# Altium PCB Micros.PcbDoc
Units mm, origin at the board's own origin, x right, y up, seen from the top; angles counter-clockwise.
Board outline 152.4 x 101.6 mm, 2 copper layers (Top Layer, Bottom Layer); 17 components, 26 nets, 97 pads, 0 vias.
Unrouted connection lines stored in the file: 39.
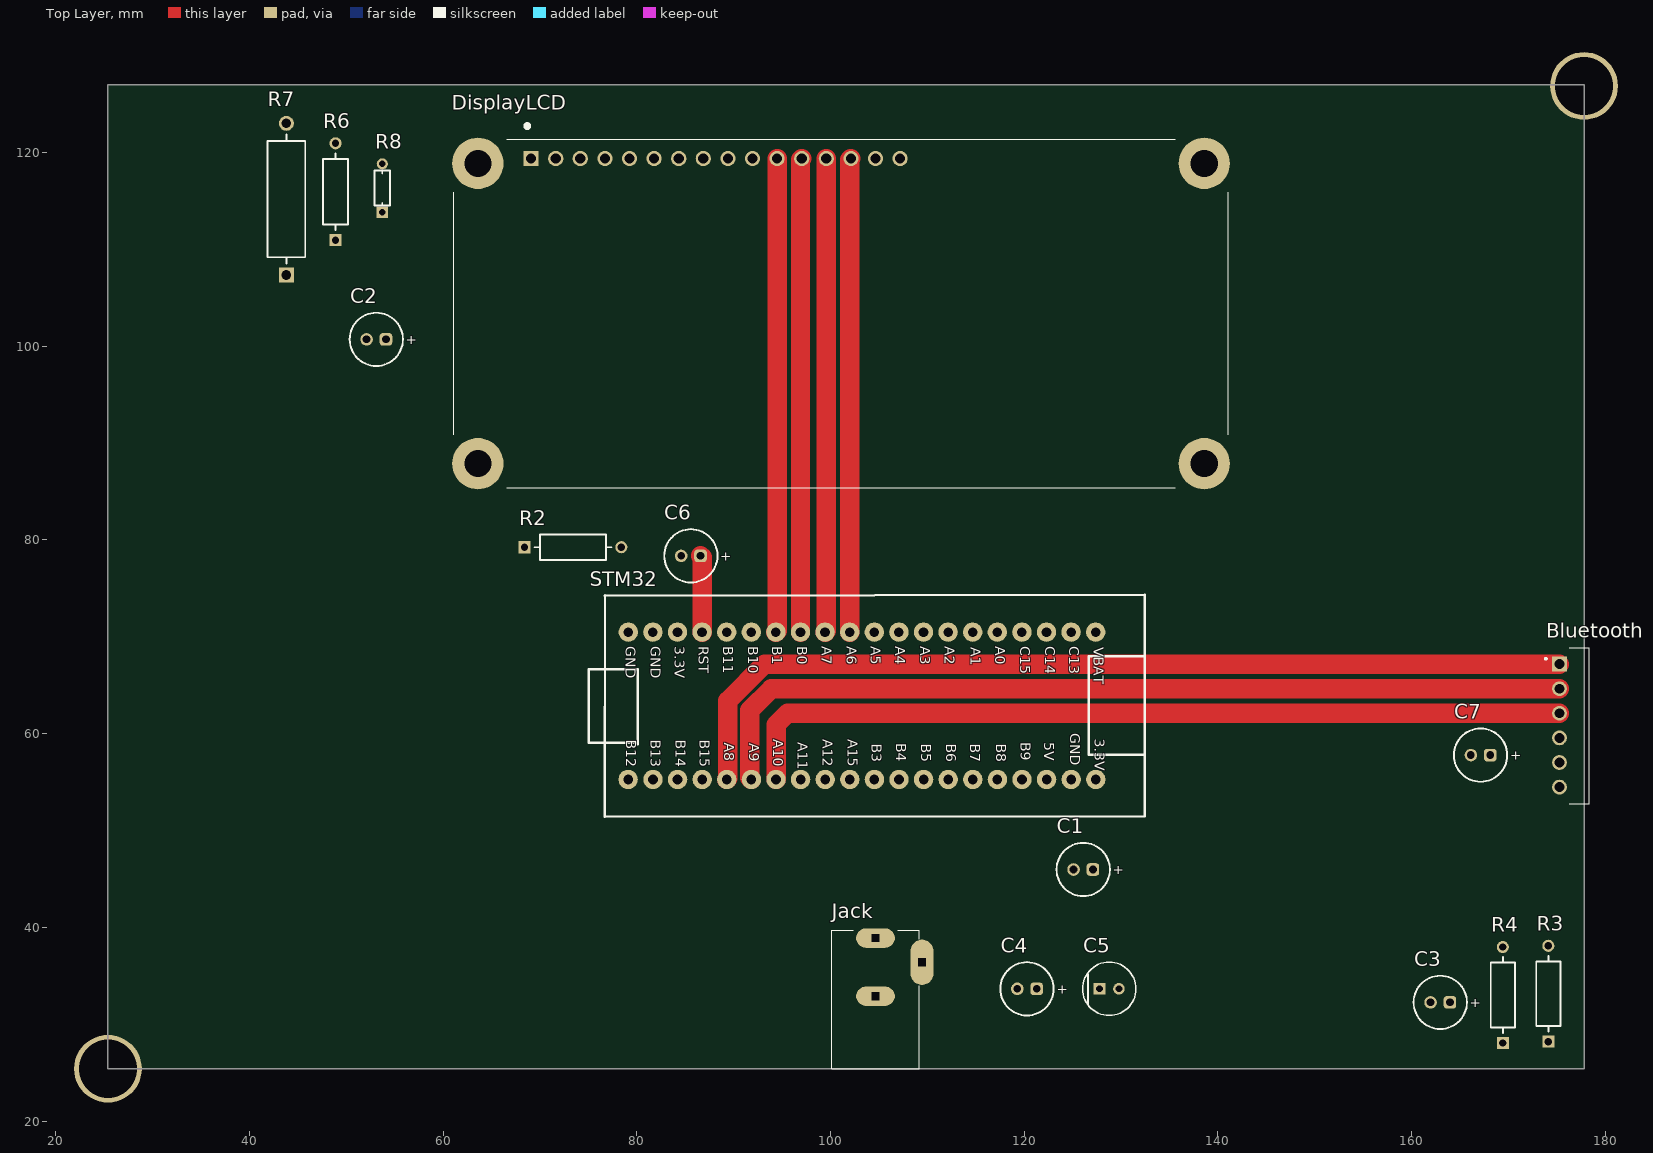
[diagram p0: Top Layer view]
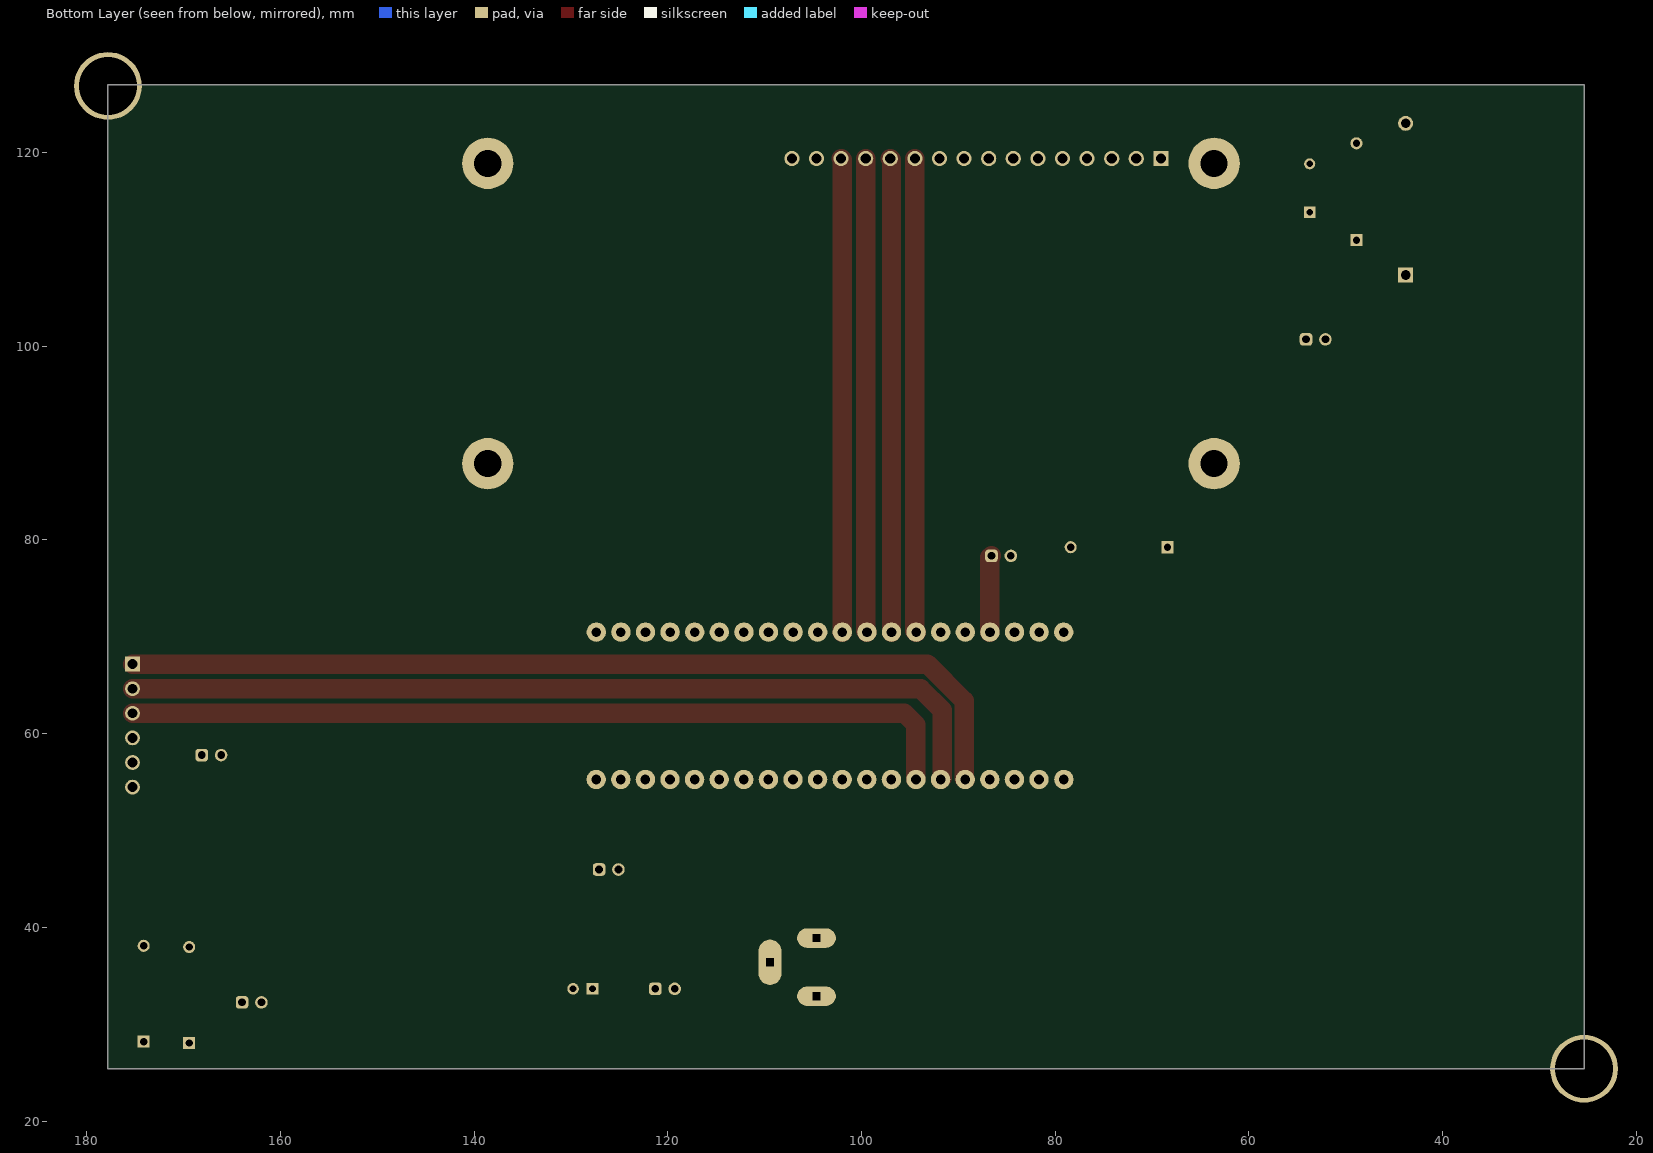
[diagram p1: Bottom Layer view, seen from below]

## Layer stack, top to bottom
Top Solder: solder mask 0.0102, Solder Resist, Dk 3.5
Top Layer: signal copper 0.0356
Dielectric 1: dielectric 0.32, FR-4, Dk 4.8
Bottom Layer: signal copper 0.0356
Bottom Solder: solder mask 0.0102, Solder Resist, Dk 3.5

## Board outline
25.4,25.4 177.8,25.4 177.8,127 25.4,127

## Design rules (kind name [scope] priority, off if disabled: settings)
Clearance [All] p1: gap=0.254 ignorepadtopadclearanceinfootprint=FALSE
PolygonConnect [All] p1: connectstyle=Relief reliefconductorwidth=0.254 reliefentries=4 polygonreliefangle="90 Angle" airgapwidth=0.254
RoutingVias [All] p1: holewidth=0.711 width=1.27 viastyle="Through Hole" minholewidth=0.711 minwidth=1.27 maxholewidth=0.711 maxwidth=1.27
SolderMaskExpansion [All] p1: expansion=0.102 istentingtop=FALSE
SupplyNets "Schematic Supply Nets_1" [InNet('GND')] p1: voltage=0.000
SupplyNets "Schematic Supply Nets" [InNet('5V')] p2: voltage=0.000
Width [All] p1: maxlimit=2 minlimit=2 preferedwidth=2 minimp=50.000000 maximp=50.000000 favimp=50.000000
30 further rules are at their usual default settings.

## Classes and differential pairs
component class Micros: Bluetooth C1 C2 C3 C4 C5 C7 DisplayLCD Jack R2 R3 R4 R6 R7 R8 STM32

## Components (designator, comment, footprint, x,y, rotation, side; value= is the part's Value field where it differs from the comment)
Bluetooth "ZC142200" MODULE_ZC142200 175.26,60.833 r0 top
C1 "100nF" WCAP-ATG8_D5H11 1396.095,1315.974 r0 top
C2 "100nF" WCAP-ATG8_D5H11 1323.102,1370.711 r0 top
C3 "100nF" WCAP-ATG8_D5H11 1432.957,1302.258 r0 top
C4 "100nF" WCAP-ATG8_D5H11 1390.285,1303.655 r0 top
C5 "10uF" FP-RAD-TH-D_5_0_5-L_11_1-MFG 128.778,33.655 r0 top
C6 "100nF" WCAP-ATG8_D5H11 1355.582,1348.359 r0 top
C7 "100nF" WCAP-ATG8_D5H11 1437.116,1327.785 r0 top
DisplayLCD "NHD-14432WG-BTFH-V#T" LCD_NHD-14432WG-BTFH-V#T 101.638,103.08 r0 top
Jack "DC-005" NINIGI_DC-005 104.648,36.393 r90 top
R2 "10K" FP-MF0207-MFG 73.406,79.248 r0 top
R3 "4.7k" FP-RCMM02-MFG 174.117,33.147 r90 top
R4 "4.7k" FP-RCMM02-MFG 169.418,33.02 r90 top
R6 "10K" FP-MF0207-MFG 48.895,115.951 r90 top
R7 "100K" FP-PR02000201003JA100-MFG 43.815,115.189 r90 top
R8 "220" FP-MBA0204-MFG 53.721,116.332 r90 top value=220Ω
STM32 "BluePill" "Stm32 BluePill" 109.015,63.099 r270 top

## Footprints (in the part's own frame and the unit in brackets; to place one, negate y for a bottom-side part, rotate by r counter-clockwise, add the part's x,y. Pads: shape width x height; smd on the part's side, far side on the other; paste and mask are expansions set on the pad)
FP-MBA0204-MFG [mm]
  rect 1.15x1.15 hole 0.65 paste-2539.97 mask+0: 1(-2.5,0)
  round 1.15 hole 0.65 paste-2539.97 mask+0: 2(2.5,0)
  silkscreen extent -1.8,-0.8 1.8,0.8, body extent -3.17,-0.9 3.17,0.9, height 0.25
FP-MF0207-MFG [mm]
  rect 1.25x1.25 hole 0.75 paste-2539.97 mask+0: 1(-5,0)
  round 1.25 hole 0.75 paste-2539.97 mask+0: 2(5,0)
  silkscreen extent -3.98,-1.3 3.98,1.3, body extent -5.72,-1.4 5.72,1.4, height 0.25
FP-PR02000201003JA100-MFG [mm]
  rect 1.55x1.55 hole 1 paste-2539.97 mask+0: 1(-7.83,0)
  round 1.55 hole 1 paste-2539.97 mask+0: 2(7.83,0)
  silkscreen extent -6.66,-1.95 6.66,1.95, body extent -8.7,-2.05 8.7,2.05, height 0.25
FP-RAD-TH-D_5_0_5-L_11_1-MFG [mm]
  rect 1.2x1.2 hole 0.7 paste-2539.97 mask+0: 1(-1,0)
  round 1.2 hole 0.7 paste-2539.97 mask+0: 2(1,0)
  silkscreen extent -2.75,-2.75 2.75,2.75, body extent -2.85,-2.85 2.85,2.85, height 0.25
FP-RCMM02-MFG [mm]
  rect 1.25x1.25 hole 0.75 paste-2539.97 mask+0: 1(-4.95,0)
  round 1.25 hole 0.75 paste-2539.97 mask+0: 2(4.95,0)
  silkscreen extent -3.93,-1.25 3.93,1.25, body extent -5.68,-1.35 5.68,1.35, height 0.25
LCD_NHD-14432WG-BTFH-V#T [mm]
  rect 1.575x1.575 / inner round 1.575 / far side rect 1.575x1.575 hole 1.05: 1(-32.55,16.3)
  round 1.575 hole 1.05: 2(-30.01,16.3) 3(-27.47,16.3) 4(-24.93,16.3) 5(-22.39,16.3) 6(-19.85,16.3) 7(-17.31,16.3) 8(-14.77,16.3) 9(-12.23,16.3) 10(-9.69,16.3) 11(-7.15,16.3) 12(-4.61,16.3) 13(-2.07,16.3) 14(0.47,16.3) 15(3.01,16.3) 16(5.55,16.3)
  round 5.3 hole 2.8: S1(-38.05,15.8) S2(-38.05,-15.2) S3(36.95,15.8) S4(36.95,-15.2)
  silkscreen extent -40.55,-17.7 39.45,19.85, body extent -40,-18 40,18, height 10.2
MODULE_ZC142200 [mm]
  rect 1.53x1.53 / inner round 1.53 / far side rect 1.53x1.53 hole 1.02: 1(0,6.35)
  round 1.53 hole 1.02: 2(0,3.81) 3(0,1.27) 4(0,-1.27) 5(0,-3.81) 6(0,-6.35)
  silkscreen extent -1.5,-8.05 3.1,8.05, body extent -0.31,-7.5 3.1,7.5, height 37
NINIGI_DC-005 [mm]
  oval 4.7x2.35 hole 0.8 square: 2(0,-4.8)
  oval 2x4 hole 0.8 square: 3(-3.5,0) 4(2.5,0)
  silkscreen extent -11,-4.5 3.3,4.5
"Stm32 BluePill" [mm]
  round 2 hole 1: 1(7.828,-29.909) 2(7.828,-27.343) 3(7.828,-24.803) 4(7.828,-22.263) 5(7.828,-19.723) 6(7.828,-17.183) 7(7.828,-14.643) 8(7.828,-12.103) 9(7.828,-9.563) 10(7.828,-7.023) 11(7.828,-4.483) 12(7.828,-1.943) 13(7.828,0.597) 14(7.828,3.137) 15(7.828,5.677) 16(7.828,8.217) 17(7.828,10.757) 18(7.828,13.297) 19(7.828,15.837) 20(7.828,18.377) 21(-7.386,18.366) 22(-7.386,15.826) 23(-7.386,13.286) 24(-7.386,10.746) 25(-7.386,8.206) 26(-7.386,5.666) 27(-7.386,3.126) 28(-7.386,0.586) 29(-7.386,-1.954) 30(-7.386,-4.494) 31(-7.386,-7.034) 32(-7.386,-9.574) 33(-7.386,-12.114) 34(-7.386,-14.654) 35(-7.386,-17.194) 36(-7.386,-19.734) 37(-7.386,-22.274) 38(-7.386,-24.814) 39(-7.386,-27.354) 40(-7.386,-29.894)
  silkscreen extent -11.22,-34 11.69,23.43, body extent -11.18,-33.27 11.68,24.29, height 12.31
WCAP-ATG8_D5H11 [mm] "Aluminum Electrolytic Capacitors, 5x11mm"
  rrect50% 1.3x1.3 hole 0.8: 1(-1269,-1270)
  round 1.3 hole 0.8: 2(-1271,-1270)
  silkscreen extent -1272.75,-1272.75 -1267.25,-1267.25, body extent -1272.49,-1272.5 -1267.5,-1267.5, height 11.31

## Part data
Bluetooth: library part CMP-013-000000-1, "1pc HC-05 6 Pin Wireless Bluetooth RF Transceiver Module Serial For Arduino", Package=None, Check_prices=https://www.snapeda.com/parts/ZC142200/YKS/view-part/?ref=eda, Component Type=Standard, Design Item ID=ZC142200, MF=YKS, MP=ZC142200, Pin Count=6, SnapEDA_Link=https://www.snapeda.com/parts/ZC142200/YKS/view-part/?ref=snap, Source=ZC142200.SchLib
C1 C2 C3 C4 C6 C7: library part CMP-03913-53914132-2, "Alum. Electrolytic Cap 100NF 63V 5MM Radial WCAP-ATG8; Lifetime 2000H +85°C", Case/Package=Radial, Leakage Current=3µA, Max Operating Temperature=85°C, Min Operating Temperature=-40°C, Ripple Current=4mA, Tolerance=20%, Voltage Rating=63V, Capacitance=100nF, Diameter=5mm, Height=11mm, Height - Seated (Max)=12.4968mm, Lead Pitch=2.0066mm, Length=11mm, Life (Hours)=2000hours, Mount="Through Hole", Packaging="Tape & Box (TB)", Pitch=2mm, Polarity=Polar, REACH SVHC=Unknown, RoHS=Compliant, Voltage Rating (DC)=63V
C5: library part CMP-05427-000260-1, "Aluminum Electrolytic Capacitors (Radial Lead Type) AEC-Q200 Qualified 10uF ±20% 50V", Case/Package=Radial, Leakage Current=3uA, Max Operating Temperature=105°C, Min Operating Temperature=-55°C, Package Quantity=2000, Ripple Current=39mA, Tolerance=20%, Voltage Rating=50V, Capacitance=10uF, Construction=RADIAL, Contact Plating=Tin, Diameter=5mm, Height=11mm, Height - Seated (Max)=0.472inch, Lead Diameter=0.5mm, Lead Free="Lead Free", Lead Pitch=2.5mm, Lead/Base Style=Straight, Length=11mm, Life (Hours)=1000Hour, Mount="Through Hole", Packaging="Ammo Pack", Polarity=Polar, Radiation Hardening=No, RoHS Compliant=Yes, Series=NHG, Termination=Radial, Voltage Rating (DC)=50V
DisplayLCD: library part CMP-007-00036-1, "- Graphic LCD Display Module Transflective Black (White - Inverted) FSTN - Film Super-Twisted Nematic Parallel, 8-Bit - 144 x 32", Case/Package=None, Availability="In Stock", Check_prices=https://www.snapeda.com/parts/NHD-14432WG-BTFH-V%23T/Newhaven+Display+Intl/view-part/?ref=eda, Component Type=Standard, Design Item ID=NHD-14432WG-BTFH-V#T, MF="Newhaven Display", MP=NHD-14432WG-BTFH-V#T, Pins=20, Price=None, Purchase-URL=https://pricing.snapeda.com/search/part/NHD-14432WG-BTFH-V#T/?ref=eda, SnapEDA_Link=https://www.snapeda.com/parts/NHD-14432WG-BTFH-V%23T/Newhaven+Display+Intl/view-part/?ref=snap, Source=NHD-14432WG-BTFH-V#T.SchLib
Jack: library part CMP-002-00071-1, "DC Jack", Case/Package=None, Availability=Unavailable, Component Type=Standard, Design Item ID=DC-005, MP=DC-005, Pins=3, Price=None, Source=DC-005.SchLib
R2 R6: library part CMP-03413-000006-1, "RES 10K OHM 1% 0.6W AXIAL", Case/Package=Conformal, Max Operating Temperature=155°C, Min Operating Temperature=-55°C, Resistance=10kR, Resistor Type="Metal Film", Temperature Coefficient=50ppm/°C, Tolerance=1%, Construction=Cylindrical, Contact Plating=Tin, Diameter=2.4mm, Lead Free="Lead Free", Length=6.3mm, Military Standard=Not, Mount="Through Hole", Packaging="Ammo Pack", Radiation Hardening=No, RoHS Compliant=Yes, Termination=Axial
R3 R4: library part CMP-02408-000034-1, "RES 4.7K OHM 2% 1/2W AXIAL", Case/Package=Molded, Resistance=4.7kR, Resistor Type="Metal Film", Temperature Coefficient=100ppm/°C, Tolerance=2%, Contact Plating=Tin, Diameter=2.5mm, Length=6.5mm, Mount="Through Hole", RoHS Compliant=Yes
R7: library part CMP-00030-42817933-1, "PR02000201003JA100 Fixed Resistor, Metal Film, 2W, 100000ohm, 500V, 5% +/-Tol, 250ppm/Cel, Through Hole Mount", Case/Package=Conformal, Max Operating Temperature=155°C, Min Operating Temperature=-55°C, Operating Supply Voltage=500V, Power Rating=2W, Resistance=100kΩ, Temperature Coefficient=250ppm/°C, Tolerance=5%, Composition="Metal Film", Contact Plating=Tin, Diameter=3.9mm, Lead Free="Lead Free", Length=12mm, Military Standard=Not, Mount="Through Hole", NexarPartId=42817933, Radiation Hardening=No, REACH SVHC="No SVHC", RoHS=Compliant, Schedule B="8533210090, 8533210090", Termination=Axial, Voltage Rating=500V, Voltage Rating (DC)=500V, Width=3.9mm
R8: library part CMP-02408-000005-1, "RES 220 OHM 0.4W 1% AXIAL", Manufacturer="Vishay BC Components", Manufacturer Part Number=MBA02040C2200FC100, Package=MBA0204, Power Rating=0.25W, Resistance=220Ω, Temperature="-55°C to +125°C", Temperature Coefficient=50ppm/°C, Temperature Range High=+125°C, Temperature Range Low=-55°C, Tolerance=1%, Voltage Rating=200V, Automotive=Yes, Automotive Grade="Grade 1", Category=Res, ComponentLink2Description=Datasheet, ComponentLink2URL=http://www.vishay.com/docs/28766/mbxsma.pdf, Composition="Metal Film", Device Class L1="Passive Components", Device Class L2=Resistors, Device Class L3="Through-Hole Resistors", Digikey Description="RES 220 OHM 0.4W 1% AXIAL", Height=1.6mm, Ipc Land Pattern Name=RESAD500W65L360D160, Lead Free=Yes, Mouser Description="Thin Film Resistors - Through Hole .4watt 220ohms 1% 1/8watt body size", Octopart=https://octopart.com/mba02040c2200fc100-vishay-43743094, RoHS=TRUE, Series="MBA/SMA 0204"
STM32: library part CMP-007-000000-1, "Designed By @Alixahedi", Component Type=Standard, Design Item ID=BluePill, Pin Count=40, Source=Schlib1.SchLib

## Free pads (board coordinates)
  round 7 hole 6: 5(25.4,25.4) 6(177.8,126.873)

## Nets (pads, with @x,y where several pads share a name; then routed paths per layer and width w, separated by ;. In a path a pad name is that pad's centre, name@x,y a point inside that pad or via, vN(x,y) a via of type N, cw(c..) or ccw(c..) an arc to the next point about the centre after c; other vN are vias at no path point)
3.3V: C3.1 R2.2 R3.1 R4.1 R8.2 STM32.21
5V: Bluetooth.5 C1.1 C2.1 C4.1 C5.2 C7.1 DisplayLCD.2 Jack.4 R7.2 STM32.18
GND: Bluetooth.4 C1.2 C3.2 C4.2 C5.1 C6.2 C7.2 DisplayLCD.1 DisplayLCD.5 DisplayLCD.7 DisplayLCD.8 DisplayLCD.9 DisplayLCD.10 DisplayLCD.16 Jack.3 R6.2 STM32.19
NetC6_1: C6.1 R2.1 STM32.37 | length 7.9
  Top Layer w2: C6.1 86.741,78.2 STM32.37
NetDisplayLCD_3: DisplayLCD.3 R6.1 R7.1
NetDisplayLCD_15: DisplayLCD.15 R8.1
PA0: STM32.25
PA1: STM32.26
PA2: STM32.27
PA3: STM32.28
PA4: STM32.29
PA5: STM32.30
PA6: DisplayLCD.14 STM32.31 | length 48.9
  Top Layer w2: STM32.31 101.981,119.253 DisplayLCD.14
PA7: DisplayLCD.13 STM32.32 | length 48.9
  Top Layer w2: STM32.32 99.568,70.612 DisplayLCD.13
PA8: Bluetooth.1 STM32.5 | length 95.6
  Top Layer w2: STM32.5 89.4,55.379 89.4,63.4 93.183,67.183 Bluetooth.1
PA9: Bluetooth.2 STM32.6 | length 91.7
  Top Layer w2: STM32.6 91.654,55.448 91.654,62.4 93.897,64.643 Bluetooth.2
PA10: Bluetooth.3 STM32.7 | length 87
  Top Layer w2: STM32.7 94.4,55.299 94.4,60.931 95.572,62.103 Bluetooth.3
PB0: DisplayLCD.12 STM32.33 | length 48.9
  Top Layer w2: STM32.33 96.901,119.253 DisplayLCD.12
PB1: DisplayLCD.11 STM32.34 | length 48.9
  Top Layer w2: STM32.34 94.488,70.612 DisplayLCD.11
PB6: R4.2 STM32.14
PB7: R3.2 STM32.15
PB8: STM32.16
PB9: STM32.17
PB10: DisplayLCD.6 STM32.35
PB11: DisplayLCD.4 STM32.36
PB15: Bluetooth.6 STM32.4
pads on no net: C2.2 DisplayLCD.S1 DisplayLCD.S2 DisplayLCD.S3 DisplayLCD.S4 Jack.2 STM32.1 STM32.2 STM32.3 STM32.8 STM32.9 STM32.10 STM32.11 STM32.12 STM32.13 STM32.20 STM32.22 STM32.23 STM32.24 STM32.38 STM32.39 STM32.40

## Text inside footprints (layer, text, board x,y; h text height)
C1: Top Overlay "+" at 129.145,45.474 h1
C2: Top Overlay "+" at 56.152,100.211 h1
C3: Top Overlay "+" at 166.007,31.758 h1
C4: Top Overlay "+" at 123.335,33.155 h1
C6: Top Overlay "+" at 88.632,77.859 h1
C7: Top Overlay "+" at 170.166,57.285 h1
STM32: Top Overlay "5V" at 121.709,59.106 h1.78 r270; Top Overlay "B9" at 119.296,59.106 h1.78 r270; Top Overlay "B8" at 116.756,58.979 h1.78 r270; Top Overlay "3.3V" at 126.916,59.487 h1.78 r270; Top Overlay "GND" at 124.402,60.051 h1.78 r270; Top Overlay "A5" at 103.802,69.012 h1.78 r270; Top Overlay "A2" at 111.453,69.012 h1.78 r270; Top Overlay "A3" at 108.908,69.012 h1.78 r270; Top Overlay "A4" at 106.323,69.012 h1.78 r270; Top Overlay "RST" at 86.022,69.012 h1.78 r270; Top Overlay "B10" at 91.153,69.012 h1.78 r270; Top Overlay "B11" at 88.568,69.012 h1.78 r270; Top Overlay "A6" at 101.313,69.012 h1.78 r270; Top Overlay "A7" at 98.728,69.012 h1.78 r270; Top Overlay "B0" at 96.182,69.012 h1.78 r270; Top Overlay "B1" at 93.623,69.012 h1.78 r270; Top Overlay "3.3V" at 83.559,69.012 h1.78 r270; Top Overlay "B15" at 86.124,59.35 h1.78 r270; Top Overlay "A8" at 88.689,59.042 h1.78 r270; Top Overlay "A11" at 96.264,59.126 h1.78 r270; Top Overlay "B3" at 103.904,58.979 h1.78 r270; Top Overlay "A9" at 91.255,59.012 h1.78 r270; Top Overlay "A15" at 101.415,59.413 h1.78 r270; Top Overlay "A12" at 98.83,59.413 h1.78 r270; Top Overlay "A10" at 93.744,59.413 h1.78 r270; Top Overlay "VBAT" at 126.795,68.939 h1.78 r270; Top Overlay "B5" at 109.009,58.979 h1.78 r270; Top Overlay "B14" at 83.64,59.38 h1.78 r270; Top Overlay "B7" at 114.044,58.979 h1.78 r270; Top Overlay "B4" at 106.424,59.012 h1.78 r270; Top Overlay "B6" at 111.575,58.948 h1.78 r270; Top Overlay "C15" at 119.22,69.012 h1.78 r270; Top Overlay "C13" at 124.275,69.012 h1.78 r270; Top Overlay "C14" at 121.786,69.012 h1.78 r270; Top Overlay "A0" at 116.655,69.012 h1.78 r270; Top Overlay "A1" at 114.095,68.941 h1.78 r270; Top Overlay "GND" at 81.069,69.012 h1.78 r270; Top Overlay "B13" at 81.069,59.36 h1.78 r270; Top Overlay "GND" at 78.504,69.012 h1.78 r270; Top Overlay "B12" at 78.56,59.35 h1.78 r270